# EAGLE board DAQ and eCVT (EAGLE 9.5.0)
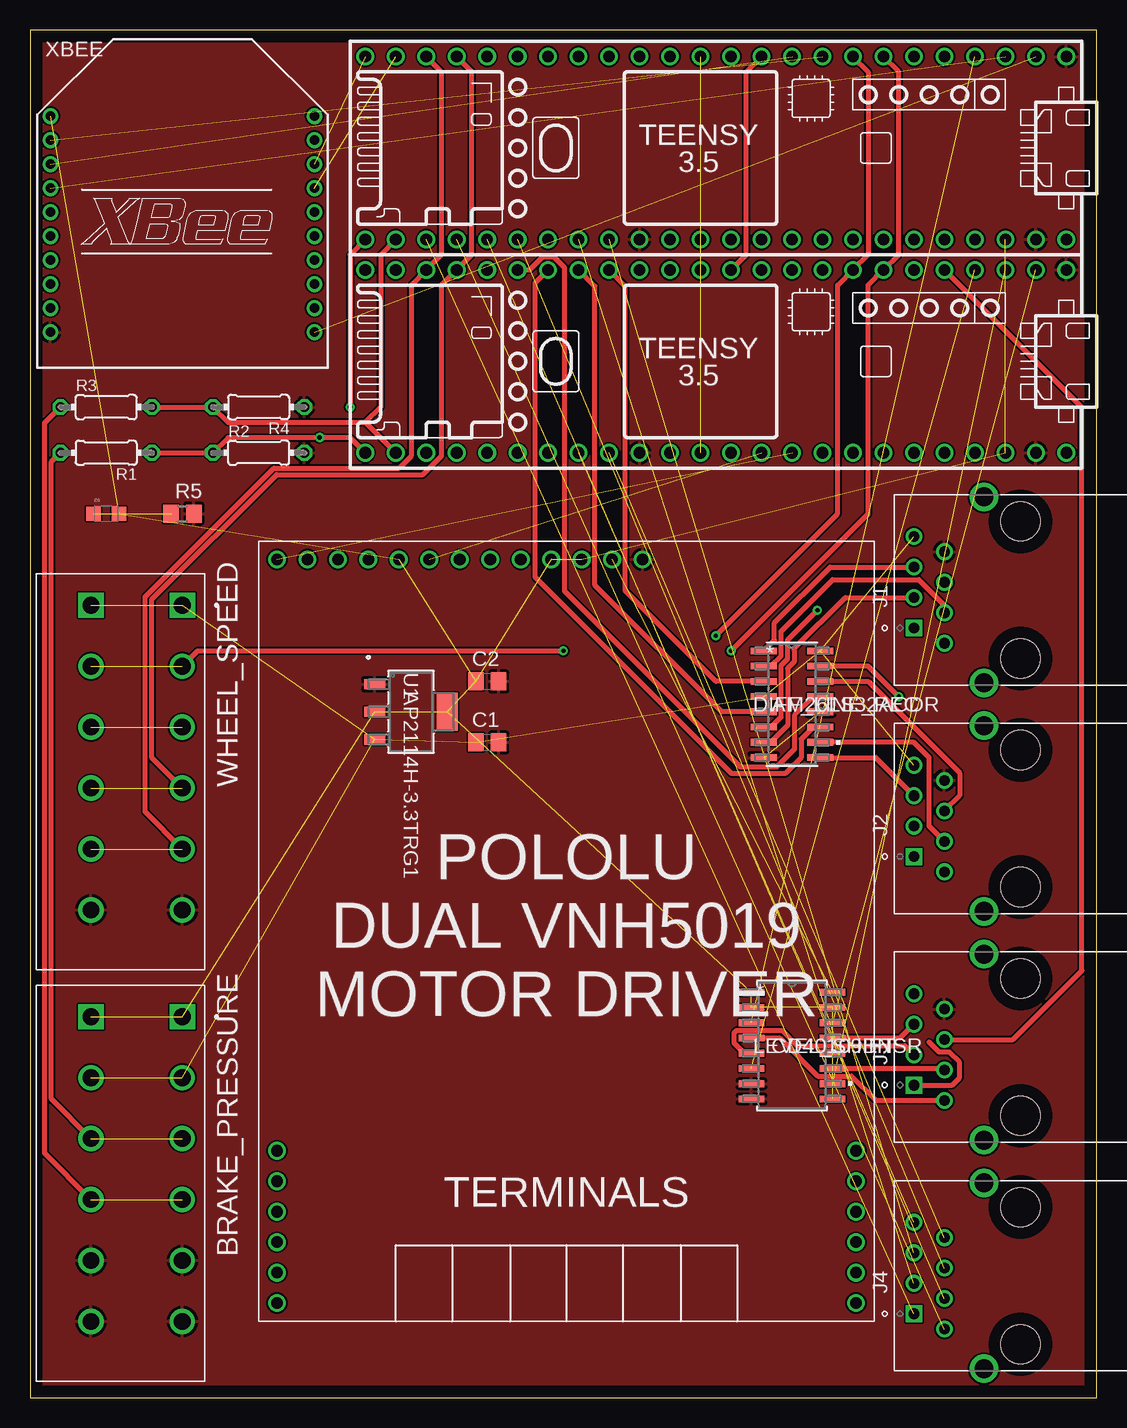
[diagram p0: board, top side]
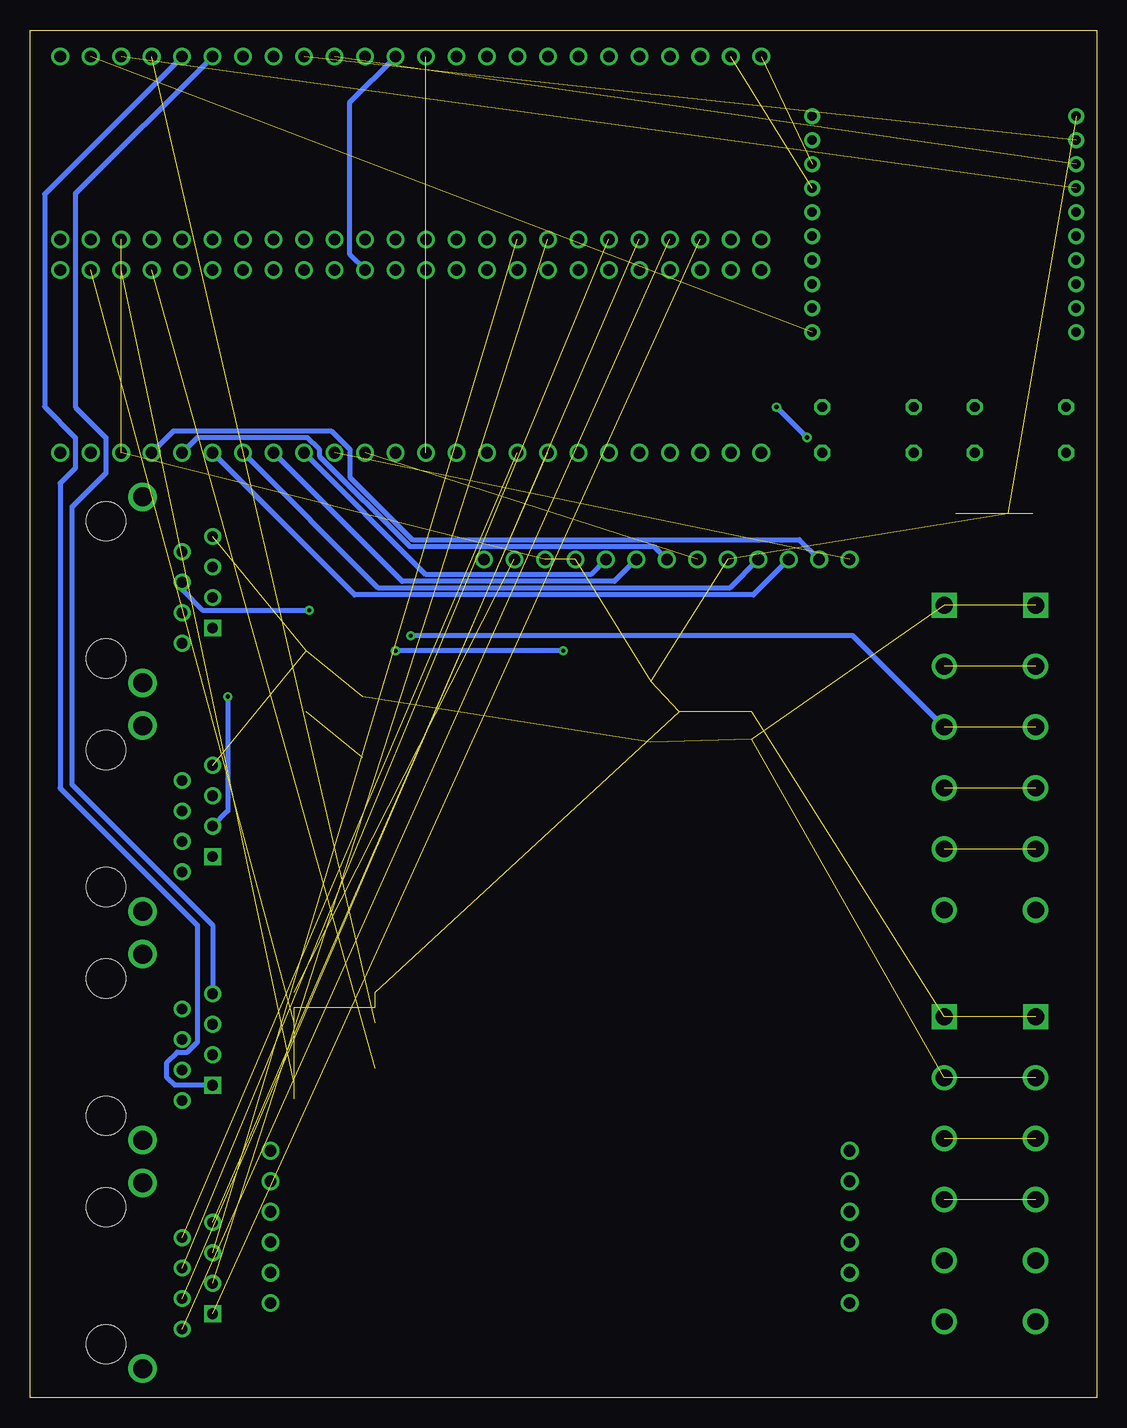
[diagram p1: board, bottom side, seen from below]

Size 88.88 x 113.97 mm. Coordinates in mm from the lower left corner, seen from the top.
Outline: 0,0 88.88,0 88.88,113.97 0,113.97 0,0
Copper layers (1*16): Top 0.035mm / dielectric 1.5mm / Bottom 0.035mm
Design rules "default": minimum track width 6mil, minimum drill 0.35mm, track to track 6mil, track to pad 6mil, pad to pad 6mil, via to via 6mil, smd to smd 6mil, copper to edge 40mil, drill to drill 6mil, minimum pad ring 10mil, minimum via ring 8mil, stop-mask expansion 4mil, vias tented up to drill 0mil, thermal gap 10mil

## Footprints (pad centres in the part's own frame; a part is rotated, then mirrored left to right if it is on the bottom)
CUI_TBL004-508-06BE-2GY = drill 1.4 square: 1_A 0,0; 1_B 0,-7.62 | drill 1.4: 2_A 5.08,0; 2_B 5.08,-7.62; 3_A 10.16,0; 3_B 10.16,-7.62; 4_A 15.24,0; 4_B 15.24,-7.62; 5_A 20.32,0; 5_B 20.32,-7.62; 6_A 25.4,0; 6_B 25.4,-7.62
C0805 = smd 1.3 x 1.5: 1 -0.95,0; 2 0.95,0
DIOC200X125X110 = smd 1.2 x 1.2: + 1.05,0; - -1.05,0
D16 = smd 2.184 x 0.559: 1 -2.362,4.445; 2 -2.362,3.175; 3 -2.362,1.905; 4 -2.362,0.635; 5 -2.362,-0.635; 6 -2.362,-1.905; 7 -2.362,-3.175; 8 -2.362,-4.445; 9 2.362,-4.445; 10 2.362,-3.175; 11 2.362,-1.905; 12 2.362,-0.635; 13 2.362,0.635; 14 2.362,1.905; 15 2.362,3.175; 16 2.362,4.445
TE_5558342-1 = drill 0.89 square: 1 -3.175,8.89 | drill 0.89: 2 -4.445,6.35; 3 -1.905,6.35; 4 0.635,6.35; 5 -0.635,8.89; 6 1.905,8.89; 7 4.445,8.89; 8 3.175,6.35 | drill 1.58: SH1 -7.745,3.05; SH2 7.745,3.05 | hole 3.25: -5.715,0; 5.715,0
NS16 = smd 2.159 x 0.559: 1 -3.378,4.445; 2 -3.378,3.175; 3 -3.378,1.905; 4 -3.378,0.635; 5 -3.378,-0.635; 6 -3.378,-1.905; 7 -3.378,-3.175; 8 -3.378,-4.445; 9 3.378,-4.445; 10 3.378,-3.175; 11 3.378,-1.905; 12 3.378,-0.635; 13 3.378,0.635; 14 3.378,1.905; 15 3.378,3.175; 16 3.378,4.445
0204/7 = drill 0.813 octagon: 1 -3.81,0; 2 3.81,0
R0805 = smd 1.3 x 1.5: 1 -0.95,0; 2 0.95,0
SOT-223 = smd 0.851 x 1.761: 1 -2.3,-3.025; 2 0,-3.025; 3 2.3,-3.025 | smd 3.151 x 1.761: 4 0,3.025
POLOLU_DUAL_VNH5019_BAJA = drill 0.965: 0 49.784,1.524; 1 49.784,4.064; 2 49.784,6.604; 3 49.784,9.144; 4 49.784,11.684; 5 49.784,14.224; 14 1.524,14.224; 15 1.524,11.684; 16 1.524,9.144; 17 1.524,6.604; 20 1.524,4.064; 21 1.524,1.524; GND 32.004,63.5; M1CS 14.224,63.5; M1EN 24.384,63.5; M1INA 21.844,63.5; M1INB 19.304,63.5; M1PWM 16.764,63.5; M2CS 1.524,63.5; M2EN 11.684,63.5; M2INA 9.144,63.5; M2INB 6.604,63.5; M2PWM 4.064,63.5; VDD 26.924,63.5; VOUT 29.464,63.5
TEENSY_3.5_BAJA = drill 0.965: 0/RX 3.81,1.27; 1/TX 6.35,1.27; 2 8.89,1.27; 3/CANTX 11.43,1.27; 3V3 36.83,1.27; 3V3_LO 6.35,16.51; 4/CANRX 13.97,1.27; 5 16.51,1.27; 6 19.05,1.27; 7 21.59,1.27; 8 24.13,1.27; 9/CS 26.67,1.27; 10/CS 29.21,1.27; 11/MOSI 31.75,1.27; 12/MISO 34.29,1.27; 13/SCK 34.29,16.51; 14/A0 31.75,16.51; 15/A1 29.21,16.51; 16/A2 26.67,16.51; 17/A3 24.13,16.51; 18/A4/SDA 21.59,16.51; 19/A5/SCL 19.05,16.51; 20/A6 16.51,16.51; 21/A7 13.97,16.51; 21/DAC0 41.91,16.51; 22/A8 11.43,16.51; 23/A9 8.89,16.51; 24 39.37,1.27; 25 41.91,1.27; 26 44.45,1.27; 27 46.99,1.27; 28 49.53,1.27; 29 52.07,1.27; 30 54.61,1.27; 31/A12 57.15,1.27; 32/A13 59.69,1.27; 33/A14 59.69,16.51; 34/A15 57.15,16.51; 35/A16 54.61,16.51; 36/A17 52.07,16.51; 37/A18 49.53,16.51; 38/A19 46.99,16.51; 39/A20 44.45,16.51; A22/DAC1 39.37,16.51; AGND 3.81,16.51; GND 1.27,1.27; GND2 36.83,16.51; VIN 1.27,16.51
XBEE = drill 0.8 pad 1.27: 1 -11,9; 2 -11,7; 3 -11,5; 4 -11,3; 5 -11,1; 6 -11,-1; 7 -11,-3; 8 -11,-5; 9 -11,-7; 10 -11,-9; 11 11,-9; 12 11,-7; 13 11,-5; 14 11,-3; 15 11,-1; 16 11,1; 17 11,3; 18 11,5; 19 11,7; 20 11,9

## Placement (x,y rotation side)
BRAKE_PRESSURE  TBL004-508-06BE-2GY  [CUI_TBL004-508-06BE-2GY]  12.7,31.75 270 top
C1  4.7uF  [C0805]  38.1,54.61 0 top
C2  4.7uF  [C0805]  38.1,59.69 0 top
D1  LTST-C170TBKT  [DIOC200X125X110]  6.35,73.66 0 top
DIFF_LINE_REC  AM26LS32ACDR  [D16]  63.5,57.78 0 top
J1  5558342-1  [TE_5558342-1]  82.55,67.31 90 top
J2  5558342-1  [TE_5558342-1]  82.55,48.26 90 top
J3  5558342-1  [TE_5558342-1]  82.55,29.21 90 top
J4  5558342-1  [TE_5558342-1]  82.55,10.16 90 top
LEVEL_SHIFT  CD40109BNSR  [NS16]  63.5,29.34 0 top
R1  [0204/7]  6.35,78.74 180 top
R2  [0204/7]  19.05,78.74 0 top
R3  [0204/7]  6.35,82.55 0 top
R4  [0204/7]  19.05,82.55 180 top
R5  [R0805]  12.7,73.66 0 top
U1  AP2114H-3.3TRG1  [SOT-223]  31.75,57.15 270 top
U$28  POLOLU_DUAL_VNH5019_BAJA  [POLOLU_DUAL_VNH5019_BAJA]  19.05,6.35 0 top
U$31  TEENSY_3.5_BAJA  [TEENSY_3.5_BAJA]  87.63,113.03 180 top
U$33  TEENSY_3.5_BAJA  [TEENSY_3.5_BAJA]  87.63,95.25 180 top
WHEEL_SPEED  TBL004-508-06BE-2GY  [CUI_TBL004-508-06BE-2GY]  12.7,66.04 270 top
XBEE  XBEE  [XBEE]  12.7,97.79 0 top

## Library data of the parts
BRAKE_PRESSURE WHEEL_SPEED = Screwless Terminal 6-Pole; MANUFACTURER: CUI; STANDARD: Manufacturer Recommendations
C1 C2 = rcl; SPICEPREFIX: C
D1 = LED; DESCRIPTION: Blue 470nm LED Indication - Discrete 3.3V 0805 _2012 Metric_; DIGI-KEY_PART_NUMBER: 160-1579-1-ND; DIGI-KEY_PURCHASE_URL: https://www.digikey.com/product-detail/en/lite-on-inc/LTST-C170TBKT/160-1579-1-ND/564889?utm_source=snapeda&utm_medium=aggregator&utm_campaign=symbol; MF: Lite-On Inc.; MP: LTST-C170TBKT; PACKAGE: 0805 Lite-On
DIFF_LINE_REC = Quad. Diff. Line Receiver; BUILT_BY: EMA_UL_Team; MANUFACTURER: Texas Instruments; MANUFACTURER_PART_NUMBER: AM26LS32ACDR; VENDOR: Texas Instruments
J1-J4 = RJ45; COMMENT: 5558342-1; DESCRIPTION: Conn RJ-45 F 8 POS 2.54mm Solder RA Thru-Hole 8 Terminal 1 Port Cat 5 Box/Tray; DIGI-KEY_PART_NUMBER: A31466-ND; DIGI-KEY_PURCHASE_URL: https://www.digikey.com/product-detail/en/te-connectivity-amp-connectors/5558342-1/A31466-ND/769610?utm_source=snapeda&utm_medium=aggregator&utm_campaign=symbol; EU_ROHS_COMPLIANCE: Compliant; MF: TE Connectivity; MP: 5558342-1; PACKAGE: None; TE_PURCHASE_URL: https://www.te.com/usa-en/product-5558342-1.html?te_bu=Cor&te_type=disp&te_campaign=seda_glo_cor-seda-global-disp-prtnr-fy19-seda-model-bom-cta_sma-317_1&elqCampaignId=32493
LEVEL_SHIFT = Quad. Level Shifter; BUILT_BY: EMA_UL_Team; MANUFACTURER: Texas Instruments; MANUFACTURER_PART_NUMBER: CD40109BNSR; VENDOR: Texas Instruments
R1-R5 = rcl; SPICEPREFIX: R
U1 = Voltage Regulator 3.3V; BUILT_BY: EMA_UL_Team; MANUFACTURER_PART_NUMBER: AP2114H-3.3TRG1; VENDOR: Diodes Inc
U$28 = Pololo Dual VNH5019
U$31 U$33 = Teensy
XBEE = Xbee; MPN: XBP24-Z7UIT-004; OC_FARNELL: 1751799; OC_NEWARK: 34R5507

## Nets
+3V3: BRAKE_PRESSURE.1_A BRAKE_PRESSURE.1_B C2.1 D1.+ LEVEL_SHIFT.1 LEVEL_SHIFT.2 LEVEL_SHIFT.9 LEVEL_SHIFT.15 U1.2 U1.4 U$28.M1EN U$28.M2EN U$28.VDD U$31.3V3_LO U$33.3V3_LO XBEE.1
+5V: BRAKE_PRESSURE.2_A BRAKE_PRESSURE.2_B C1.1 DIFF_LINE_REC.4 DIFF_LINE_REC.16 J1.7 J2.7 U1.3 WHEEL_SPEED.1_A WHEEL_SPEED.1_B
+12V: LEVEL_SHIFT.16 U$28.VOUT
BKSHIFT_LED: LEVEL_SHIFT.10 U$33.1/TX
BKSHIFT_LED_12V: J3.3 LEVEL_SHIFT.11
DAQ_ECVT\_CS: U$31.15/A1
DAQ_ECVT\_MISO: U$31.12/MISO
DAQ_ECVT_CS: U$33.15/A1
DAQ_ECVT_MISO: U$33.12/MISO
DAQ_ECVT_MOSI: U$31.11/MOSI U$33.11/MOSI
DAQ_ECVT_RX: U$31.9/CS U$33.10/CS
DAQ_ECVT_SCK: U$31.14/A0 U$33.14/A0
DAQ_ECVT_TX: U$31.10/CS U$33.9/CS
DAQ_SPARE_A16_PWM: J4.1 U$31.35/A16
DAQ_SPARE_A17_PWM: J4.2 U$31.36/A17
DAQ_SPARE_A18_PWM_SCL: J4.3 U$31.37/A18
DAQ_SPARE_A19_PWM_SDA: J4.4 U$31.38/A19
DAQ_SPARE_A21_DAC0: J4.5 U$31.21/DAC0
DAQ_SPARE_A22_DAC1: J4.6 U$31.A22/DAC1
DAQ_STATUS_LED: LEVEL_SHIFT.3 U$31.2
DAQ_STATUS_LED_12V: J3.2 LEVEL_SHIFT.4
DAQ_XBEE_CS: U$31.31/A12 XBEE.17
DAQ_XBEE_MISO: U$31.1/TX XBEE.4
DAQ_XBEE_MOSI: U$31.0/RX XBEE.11
DAQ_XBEE_RX: U$31.7 XBEE.2
DAQ_XBEE_SCK: U$31.32/A13 XBEE.18
DAQ_XBEE_TX: U$31.8 XBEE.3
ECVT_SPARE_A21_DAC0: J4.7 U$33.21/DAC0
ECVT_SPARE_A22_DAC1: J4.8 U$33.A22/DAC1
ECVT_STATUS_LED: LEVEL_SHIFT.6 U$33.2
ECVT_STATUS_LED_12V: J3.5 LEVEL_SHIFT.5
ENGINE_SPEED: U$31.5 U$33.5 WHEEL_SPEED.2_A WHEEL_SPEED.2_B
FBRAKE_PRESSURE: R1.1 R2.1 U$31.33/A14 U$33.33/A14
FBRAKE_PRESSURE_W/O_RES: BRAKE_PRESSURE.3_A BRAKE_PRESSURE.3_B R1.2
FLWHEEL_SPEED: U$31.29 U$33.29 WHEEL_SPEED.4_A WHEEL_SPEED.4_B
FRWHEEL_SPEED: U$31.30 U$33.30 WHEEL_SPEED.5_A WHEEL_SPEED.5_B
GND: BRAKE_PRESSURE.5_A BRAKE_PRESSURE.5_B BRAKE_PRESSURE.6_A BRAKE_PRESSURE.6_B C1.2 C2.2 DIFF_LINE_REC.8 DIFF_LINE_REC.12 J1.8 J2.8 J3.8 LEVEL_SHIFT.7 LEVEL_SHIFT.8 R2.2 R4.1 R5.2 U1.1 U$28.GND U$31.AGND U$31.GND U$31.GND2 U$33.AGND U$33.GND U$33.GND2 WHEEL_SPEED.6_A WHEEL_SPEED.6_B XBEE.10
LAUNCH_BUTTON: J3.4 U$33.3/CANTX
LOGGER_BUTTON: J3.1 U$31.3/CANTX
MARKER_BUTTON: J3.7 U$31.4/CANRX
N$2: U$31.3V3
N$3: U$31.13/SCK
N$4: U$31.16/A2
N$5: U$31.17/A3
N$6: U$31.18/A4/SDA
N$7: U$31.19/A5/SCL
N$8: U$31.20/A6
N$9: U$31.21/A7
N$10: U$31.22/A8
N$11: U$31.23/A9
N$12: U$31.24
N$13: U$31.25
N$14: U$31.26
N$15: U$31.27
N$16: U$31.28
N$17: U$31.39/A20
N$18: U$31.VIN
N$19: U$33.3V3
N$20: U$33.13/SCK
N$21: LEVEL_SHIFT.12
N$22: U$33.39/A20
N$23: U$33.7
N$24: U$33.8
N$25: U$33.28
N$26: U$33.35/A16
N$27: U$33.36/A17
N$28: U$33.37/A18
N$29: U$33.38/A19
N$30: U$33.VIN
N$31: U$33.4/CANRX
N$32: U$33.31/A12
N$33: U$33.32/A13
N$34: D1.- R5.1
N$43: XBEE.5
N$45: XBEE.13
N$46: XBEE.6
N$47: XBEE.9
N$48: XBEE.12
N$49: XBEE.16
N$50: XBEE.15
N$51: XBEE.19
N$52: XBEE.20
N$53: XBEE.14
PENC_A: DIFF_LINE_REC.3 U$33.24
PENC_B: DIFF_LINE_REC.5 U$33.25
PENC_CHA: DIFF_LINE_REC.2 J1.3
PENC_CHA/: DIFF_LINE_REC.1 J1.6
PENC_CHB: DIFF_LINE_REC.6 J1.4
PENC_CHB/: DIFF_LINE_REC.7 J1.5
PENC_CHI: J1.1
PENC_CHI/: J1.2
PMOT_CS: U$28.M1CS U$33.16/A2
PMOT_INA: U$28.M1INA U$33.18/A4/SDA
PMOT_INB: U$28.M1INB U$33.19/A5/SCL
PMOT_PWM: U$28.M1PWM U$33.22/A8
RBRAKE_PRESSURE: R3.2 R4.2 U$31.34/A15 U$33.34/A15
RBRAKE_PRESSURE_W/O_RES: BRAKE_PRESSURE.4_A BRAKE_PRESSURE.4_B R3.1
RWHEELS_SPEED: U$31.6 U$33.6 WHEEL_SPEED.3_A WHEEL_SPEED.3_B
SENC_A: DIFF_LINE_REC.11 U$33.26
SENC_B: DIFF_LINE_REC.13 U$33.27
SENC_CHA: DIFF_LINE_REC.10 J2.3
SENC_CHA/: DIFF_LINE_REC.9 J2.6
SENC_CHB: DIFF_LINE_REC.14 J2.4
SENC_CHB/: DIFF_LINE_REC.15 J2.5
SENC_CHI: J2.1
SENC_CHI/: J2.2
SMOT_CS: U$28.M2CS U$33.17/A3
SMOT_INA: U$28.M2INA U$33.20/A6
SMOT_INB: U$28.M2INB U$33.21/A7
SMOT_PWM: U$28.M2PWM U$33.23/A9
UPSHIFT_LED: LEVEL_SHIFT.14 U$33.0/RX
UPSHIFT_LED_12V: J3.6 LEVEL_SHIFT.13

## Tracks (layer width: path | path; a pad name or v marks a point on that pad's centre or on a via)
+3V3  (15 unrouted)
+5V  (9 unrouted)
+12V  (1 unrouted)
BKSHIFT_LED  (1 unrouted)
BKSHIFT_LED_12V
  Top 0.406: LEVEL_SHIFT.11 76.07,27.43 J3.3
DAQ_ECVT_MOSI  (1 unrouted)
DAQ_ECVT_RX
  Top 0.406: U$33.10/CS 59.69,95.25 59.69,110.49 U$31.9/CS
DAQ_ECVT_SCK  (1 unrouted)
DAQ_ECVT_TX
  Bottom 0.406: U$33.9/CS 62.23,95.25 62.23,107.95 U$31.10/CS
DAQ_SPARE_A16_PWM  (1 unrouted)
DAQ_SPARE_A17_PWM  (1 unrouted)
DAQ_SPARE_A18_PWM_SCL  (1 unrouted)
DAQ_SPARE_A19_PWM_SDA  (1 unrouted)
DAQ_SPARE_A21_DAC0  (1 unrouted)
DAQ_SPARE_A22_DAC1  (1 unrouted)
DAQ_STATUS_LED  (1 unrouted)
DAQ_STATUS_LED_12V
  Top 0.406: 59.53,29.97 LEVEL_SHIFT.4 62.48,29.97 65.65,26.8 68.46,26.8 70.49,24.77 J3.2
DAQ_XBEE_CS  (1 unrouted)
DAQ_XBEE_MISO  (1 unrouted)
DAQ_XBEE_MOSI  (1 unrouted)
DAQ_XBEE_RX  (1 unrouted)
DAQ_XBEE_SCK  (1 unrouted)
DAQ_XBEE_TX  (1 unrouted)
ECVT_SPARE_A21_DAC0  (1 unrouted)
ECVT_SPARE_A22_DAC1  (1 unrouted)
ECVT_STATUS_LED  (1 unrouted)
ECVT_STATUS_LED_12V
  Top 0.406: J3.5 72.9,29.34 63.9,29.34 62.63,30.61 58.9,30.61 58.69,30.4 58.69,29.55 59.53,28.7 LEVEL_SHIFT.5
ENGINE_SPEED  (via drill 0.35)  (1 unrouted)
  Top 0.406: WHEEL_SPEED.2_A 13.97,62.23 v44.45,62.23 | v58.42,62.23 69.85,73.66 69.85,92.71 U$33.5 72.39,95.25 72.39,110.49 U$31.5
  Bottom 0.406: v44.45,62.23 v58.42,62.23
FBRAKE_PRESSURE  (via drill 0.35)
  Top 0.406: R1.1 R2.1 16.51,80.01 v24.13,80.01 26.67,80.01 U$33.33/A14 | U$31.33/A14 26.67,95.25 v26.67,82.55
  Bottom 0.406: v26.67,82.55 v24.13,80.01
FBRAKE_PRESSURE_W/O_RES  (1 unrouted)
  Top 0.406: BRAKE_PRESSURE.3_B 1.78,24.89 1.78,77.98 R1.2
FLWHEEL_SPEED  (1 unrouted)
  Top 0.406: WHEEL_SPEED.4_A 10.16,53.34 10.16,66.52 20.55,76.91 32.74,76.91 34.29,78.47 34.29,92.71 U$33.29 36.83,95.25 36.83,110.49 U$31.29
FRWHEEL_SPEED  (1 unrouted)
  Top 0.406: WHEEL_SPEED.5_A 9.6,48.82 9.6,66.75 20.32,77.47 30.75,77.47 31.75,78.47 31.75,92.71 U$33.30 34.29,95.25 34.29,110.49 U$31.30
GND  (1 unrouted)
  pour Top: -1.27,-1.27 90.17,-1.27 90.17,115.57 -1.27,115.57
LAUNCH_BUTTON
  Top 0.406: J3.4 81.92,29.84 87.66,35.59 87.66,82.52 U$33.3/CANTX
LOGGER_BUTTON
  Top 0.406: J3.1 76.83,26.04 77.47,26.67 77.47,27.94 76.62,28.79 75.76,28.79 74.93,29.62
  Bottom 0.406: U$31.3/CANTX 87.66,100.3 87.66,82.58 85.09,80.01 85.09,77.47 86.36,76.2 86.36,50.8 74.93,39.37 74.93,29.62 75.76,28.79 76.62,28.79 77.47,27.94 77.47,26.67 76.83,26.04 J3.1
MARKER_BUTTON
  Bottom 0.406: U$31.4/CANRX 85.09,100.33 85.09,82.55 82.55,80.01 82.55,77.05 85.39,74.2 85.39,51.1 73.66,39.37 J3.7
N$34  (1 unrouted)
PENC_A
  Top 0.406: DIFF_LINE_REC.3 57.15,59.69 49.61,67.23 49.61,92.63 U$33.24
PENC_B
  Top 0.406: U$33.25 47.07,92.63 47.07,67.71 57.63,57.15 DIFF_LINE_REC.5
PENC_CHA
  Top 0.406: DIFF_LINE_REC.2 61.74,60.96 62.59,61.8 62.59,63.86 66.89,68.16 74.08,68.16 76.2,66.04 J1.3
PENC_CHA/
  Top 0.406: J1.6 66.67,69.22 62.03,64.57 62.03,63.12 DIFF_LINE_REC.1
PENC_CHB  (via drill 0.35)
  Top 0.406: DIFF_LINE_REC.6 61.74,55.88 62.59,56.72 62.59,61.01 63.14,61.57 63.14,63.14 v65.62,65.62
  Bottom 0.406: J1.4 76.2,67.31 74.51,65.62 v65.62,65.62
PENC_CHB/
  Top 0.406: J1.5 67.94,66.67 63.7,62.43 63.7,62.23 63.7,61.34 63.14,60.78 63.14,56.01 61.74,54.61 DIFF_LINE_REC.7
PMOT_CS  (1 unrouted)
PMOT_INA
  Bottom 0.406: U$28.M1INA 42.16,68.58 55.88,68.58 U$33.18/A4/SDA
PMOT_INB
  Bottom 0.406: U$28.M1INB 40.18,68.02 57.86,68.02 U$33.19/A5/SCL
PMOT_PWM
  Bottom 0.406: U$33.22/A8 74.93,80.01 65.77,80.01 64.77,79.02 64.77,78.47 57.25,70.94 36.91,70.94 U$28.M1PWM
RBRAKE_PRESSURE
  Top 0.406: R3.2 R4.2 16.51,81.28 27.94,81.28 | 27.94,81.28 U$33.34/A15 | U$31.34/A15 29.21,95.25 29.21,82.55 27.94,81.28
RBRAKE_PRESSURE_W/O_RES  (1 unrouted)
  Top 0.406: BRAKE_PRESSURE.4_B 1.22,20.37 1.22,81.23 R3.1
RWHEELS_SPEED  (via drill 0.35)  (1 unrouted)
  Top 0.406: v57.15,63.5 67.31,73.66 67.31,92.71 U$33.6 69.85,95.25 69.85,110.49 U$31.6
  Bottom 0.406: WHEEL_SPEED.3_A 20.32,63.5 v57.15,63.5
SENC_A
  Top 0.406: DIFF_LINE_REC.11 65.26,55.88 64.26,54.88 64.26,53.34 62.92,52 58.47,52 42.09,68.38 42.09,92.89 U$33.26
SENC_B
  Top 0.406: DIFF_LINE_REC.13 65.26,58.42 63.7,56.87 63.7,54.03 62.23,52.56 59.2,52.56 44.53,67.23 44.53,94.18 43.63,95.07 42.73,95.07 41.63,93.98 U$33.27
SENC_CHA
  Top 0.406: J2.3 74.93,47.62 74.93,53.34 73.66,54.61 DIFF_LINE_REC.10
SENC_CHA/
  Top 0.406: DIFF_LINE_REC.9 70.48,53.34 J2.6
SENC_CHB
  Top 0.406: J2.4 77.47,50.16 77.47,52.07 69.85,59.69 DIFF_LINE_REC.14
SENC_CHB/  (via drill 0.35)
  Top 0.406: v72.39,58.42 69.85,60.96 DIFF_LINE_REC.15
  Bottom 0.406: J2.5 72.39,48.9 v72.39,58.42
SMOT_CS  (1 unrouted)
SMOT_INA
  Bottom 0.406: U$33.20/A6 59.84,67.46 30.58,67.46 U$28.M2INA
SMOT_INB
  Bottom 0.406: U$28.M2INB 28.6,66.9 61.82,66.9 U$33.21/A7
SMOT_PWM
  Bottom 0.406: U$33.23/A9 76.91,80.57 63.78,80.57 62.23,79.02 62.23,76.72 57.02,71.5 24.77,71.5 U$28.M2PWM
UPSHIFT_LED  (1 unrouted)
UPSHIFT_LED_12V
  Top 0.406: LEVEL_SHIFT.13 72.52,29.97 J3.6